# EAGLE board dmx-interface (EAGLE 8.4.1)
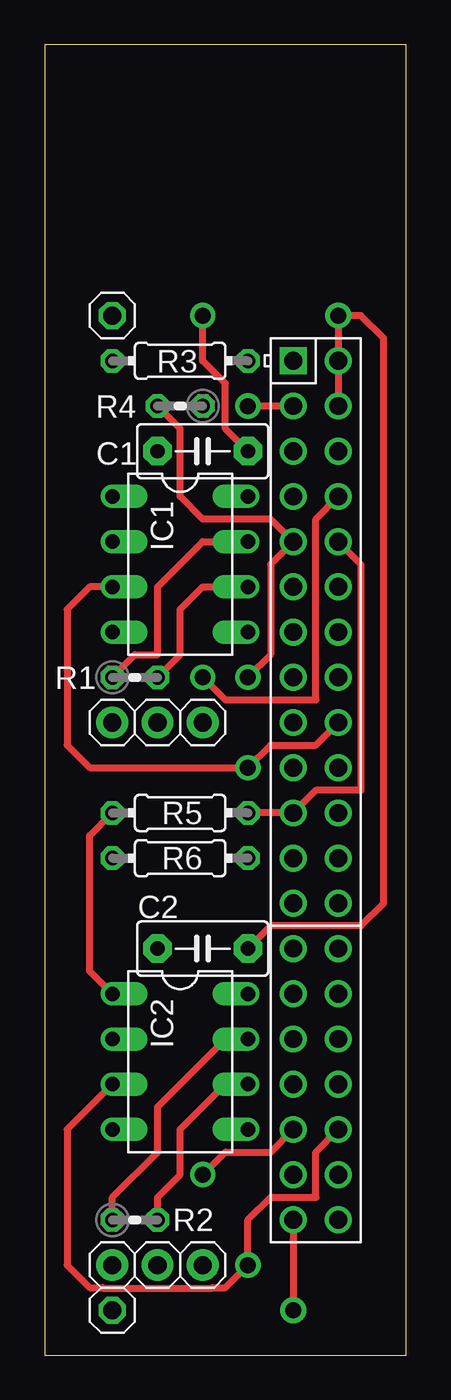
[diagram p0: board, top side]
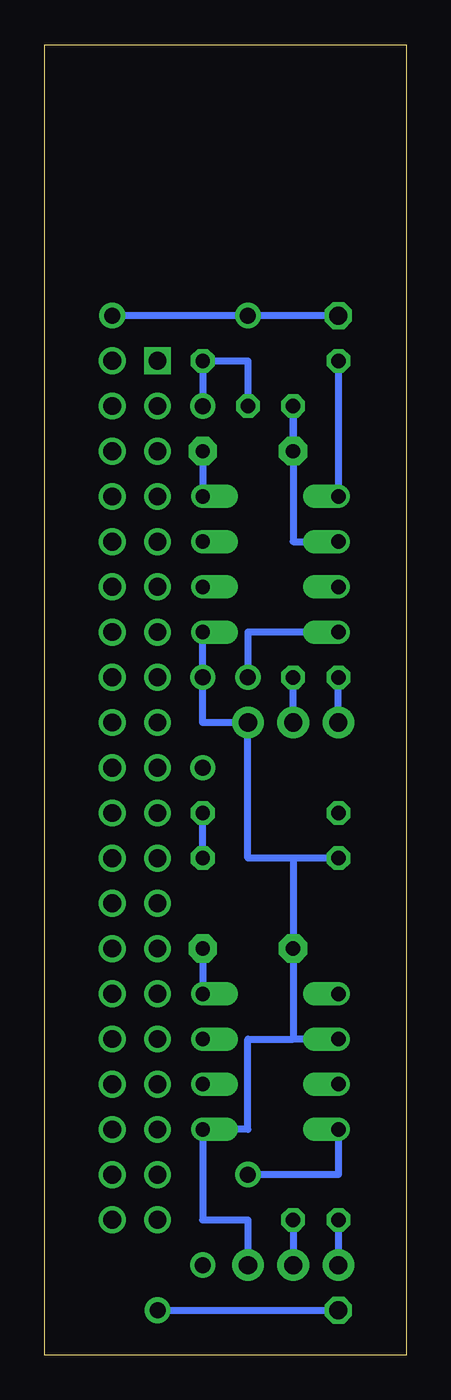
[diagram p1: board, bottom side, seen from below]

Size 20.32 x 73.65 mm. Coordinates in mm from the lower left corner, seen from the top.
Outline: 0,0 20.32,0 20.32,73.65 0,73.65 0,0
Copper layers (1*16): Top 0.035mm / dielectric 1.5mm / Bottom 0.035mm
Design rules "default": minimum track width 10mil, minimum drill 24mil, track to track 8mil, track to pad 8mil, pad to pad 8mil, via to via 8mil, smd to smd 8mil, copper to edge 40mil, drill to drill 8mil, minimum pad ring 10mil, minimum via ring 8mil, stop-mask expansion 4mil, vias tented up to drill 0mil, thermal gap 10mil

## Footprints (pad centres in the part's own frame; a part is rotated, then mirrored left to right if it is on the bottom)
C5B3 = drill 0.813 pad 1.6 octagon: 1 -2.54,0; 2 2.54,0
DIL08 = drill 0.813 offset: 1 -3.81,-3.81; 2 -1.27,-3.81; 3 1.27,-3.81; 4 3.81,-3.81; 5 3.81,3.81; 6 1.27,3.81; 7 -1.27,3.81; 8 -3.81,3.81
1X03 = drill 1.016 pad 1.778: 1 -2.54,0; 2 0,0; 3 2.54,0
1X01 = drill 1.016 octagon: 1 0,0
0204V = drill 0.813 octagon: 1 -1.27,0; 2 1.27,0
0204/7 = drill 0.813 octagon: 1 -3.81,0; 2 3.81,0
RASPI_GPIO_B+_PIN = drill 1 square: 1 -24.13,-1.27 | drill 1: 2 -24.13,1.27; 3 -21.59,-1.27; 4 -21.59,1.27; 5 -19.05,-1.27; 6 -19.05,1.27; 7 -16.51,-1.27; 8 -16.51,1.27; 9 -13.97,-1.27; 10 -13.97,1.27; 11 -11.43,-1.27; 12 -11.43,1.27; 13 -8.89,-1.27; 14 -8.89,1.27; 15 -6.35,-1.27; 16 -6.35,1.27; 17 -3.81,-1.27; 18 -3.81,1.27; 19 -1.27,-1.27; 20 -1.27,1.27; 21 1.27,-1.27; 22 1.27,1.27; 23 3.81,-1.27; 24 3.81,1.27; 25 6.35,-1.27; 26 6.35,1.27; 27 8.89,-1.27; 28 8.89,1.27; 29 11.43,-1.27; 30 11.43,1.27; 31 13.97,-1.27; 32 13.97,1.27; 33 16.51,-1.27; 34 16.51,1.27; 35 19.05,-1.27; 36 19.05,1.27; 37 21.59,-1.27; 38 21.59,1.27; 39 24.13,-1.27; 40 24.13,1.27

## Placement (x,y rotation side)
C1  100n  [C5B3]  8.89,50.8 180 top
C2  100n  [C5B3]  8.89,22.86 180 top
IC1  75176B  [DIL08]  7.62,44.45 270 top
IC2  75176B  [DIL08]  7.62,16.51 270 top
JP1  DMX OUT  [1X03]  6.35,35.56 180 top
JP2  DMX IN  [1X03]  6.35,5.08 180 top
JP3  +5V  [1X01]  3.81,58.42 180 top
JP4  GND  [1X01]  3.81,2.54 180 top
R1  120  [0204V]  5.08,38.1 0 top
R2  120  [0204V]  5.08,7.62 0 top
R3  1k  [0204/7]  7.62,55.88 180 top
R4  2k  [0204V]  7.62,53.34 180 top
R5  1k  [0204/7]  7.62,30.48 180 top
R6  2k  [0204/7]  7.62,27.94 0 top
X1  RASPI_GPIO_B+#_PIN  [RASPI_GPIO_B+_PIN]  15.24,31.75 270 top

## Library data of the parts
C1 C2 = capacitor-wima
IC1 IC2 = 751xx
JP1-JP4 = pinhead
R1-R6 = resistor
X1 = raspberrypi_bastelstube_v13

## Nets
+5V: C1.1 C2.1 IC1.8 IC2.8 JP3.1 X1.2 X1.4
GND: C1.2 C2.2 IC1.2 IC1.5 IC2.2 IC2.5 JP1.1 JP2.1 R4.2 R6.1 X1.9
N$1: IC2.1 R5.2
N$2: R5.1 R6.2 X1.10 X1.21
N$3: IC1.6 JP1.2 R1.2
N$4: R3.1 R4.1 X1.3
N$5: IC2.4 X1.35
N$6: IC1.4 X1.8
N$7: IC1.7 JP1.3 R1.1
N$8: IC2.7 JP2.3 R2.1
N$9: IC2.6 JP2.2 R2.2
N$10: IC2.3 X1.36
N$11: IC1.3 X1.18
N$12: JP4.1 X1.39
N$14: IC1.1 R3.2

## Tracks (layer width: path | path; a pad name or v marks a point on that pad's centre or on a via)
+5V  (via drill 0.9 pad 1.42, 0.9 pad 1.45)
  Top 0.406: X1.4 X1.2 v16.51,58.42 17.78,58.42 19.05,57.15 19.05,25.4 17.78,24.13 12.7,24.13 C2.1 | C1.1 10.16,52.07 10.16,54.61 8.89,55.88 v8.89,58.42
  Bottom 0.406: C1.1 IC1.8 | JP3.1 v8.89,58.42 v16.51,58.42 | C2.1 IC2.8
GND  (via drill 0.9 pad 1.42)
  Top 0.406: v11.43,38.1 12.7,39.37 12.7,44.45 X1.9 12.7,46.99 8.89,46.99 7.62,48.26 7.62,52.07 R4.2
  Bottom 0.406: IC2.2 6.35,17.78 | JP2.1 8.89,7.62 11.43,7.62 IC2.5 8.89,12.7 8.89,17.78 6.35,17.78 | IC1.5 v11.43,38.1 11.43,35.56 JP1.1 8.89,27.94 6.35,27.94 | IC1.2 6.35,45.72 R4.2 C1.2 | 6.35,17.78 C2.2 6.35,27.94 | R6.1 6.35,27.94
N$1
  Top 0.406: IC2.1 2.54,21.59 2.54,29.21 R5.2
N$2
  Top 0.406: X1.10 17.78,44.45 17.78,31.75 15.24,31.75 X1.21 R5.1
  Bottom 0.406: R6.2 R5.1
N$3
  Top 0.406: R1.2 7.62,39.37 7.62,41.91 8.89,43.18 IC1.6
  Bottom 0.406: JP1.2 R1.2
N$4  (via drill 0.9 pad 1.42)
  Top 0.406: X1.3 v11.43,53.34
  Bottom 0.406: R4.1 8.89,55.88 R3.1 v11.43,53.34
N$5  (via drill 0.9 pad 1.42)
  Top 0.406: v8.89,10.16 10.16,11.43 12.7,11.43 X1.35
  Bottom 0.406: IC2.4 3.81,10.16 v8.89,10.16
N$6  (via drill 0.9 pad 1.42)
  Top 0.406: v8.89,38.1 10.16,36.83 15.24,36.83 15.24,46.99 X1.8
  Bottom 0.406: IC1.4 8.89,40.64 v8.89,38.1
N$7
  Top 0.406: R1.1 5.08,39.37 6.35,39.37 6.35,43.18 8.89,45.72 IC1.7
  Bottom 0.406: JP1.3 R1.1
N$8
  Top 0.406: IC2.7 10.16,17.78 6.35,13.97 6.35,11.43 3.81,8.89 R2.1
  Bottom 0.406: R2.1 JP2.3
N$9
  Top 0.406: IC2.6 10.16,15.24 7.62,12.7 7.62,10.16 6.35,8.89 R2.2
  Bottom 0.406: R2.2 JP2.2
N$10  (via drill 0.9 pad 1.42)
  Top 0.406: X1.36 15.24,11.43 15.24,8.89 12.7,8.89 11.43,7.62 v11.43,5.08 10.16,3.81 9.45,3.81 9.43,3.79 3.27,3.79 3.25,3.81 2.54,3.81 1.27,5.08 1.27,12.7 IC2.3
N$11  (via drill 0.9 pad 1.42)
  Top 0.406: IC1.3 2.54,43.18 1.27,41.91 1.27,34.29 2.54,33.02 v11.43,33.02 12.7,34.29 15.24,34.29 X1.18
N$12  (via drill 0.9 pad 1.45)
  Top 0.406: X1.39 v13.97,2.54
  Bottom 0.406: v13.97,2.54 JP4.1
N$14
  Bottom 0.406: R3.2 IC1.1